# Altium PCB Charger.PcbDoc
Units mm, origin at the board's own origin, x right, y up, seen from the top; angles counter-clockwise.
Board outline 28.74 x 23.59 mm, 4 copper layers (Top Layer, Layer 1, Layer 2, Bottom Layer), stack 1.012 mm thick; 75 components, 57 nets, 264 pads, 94 vias.
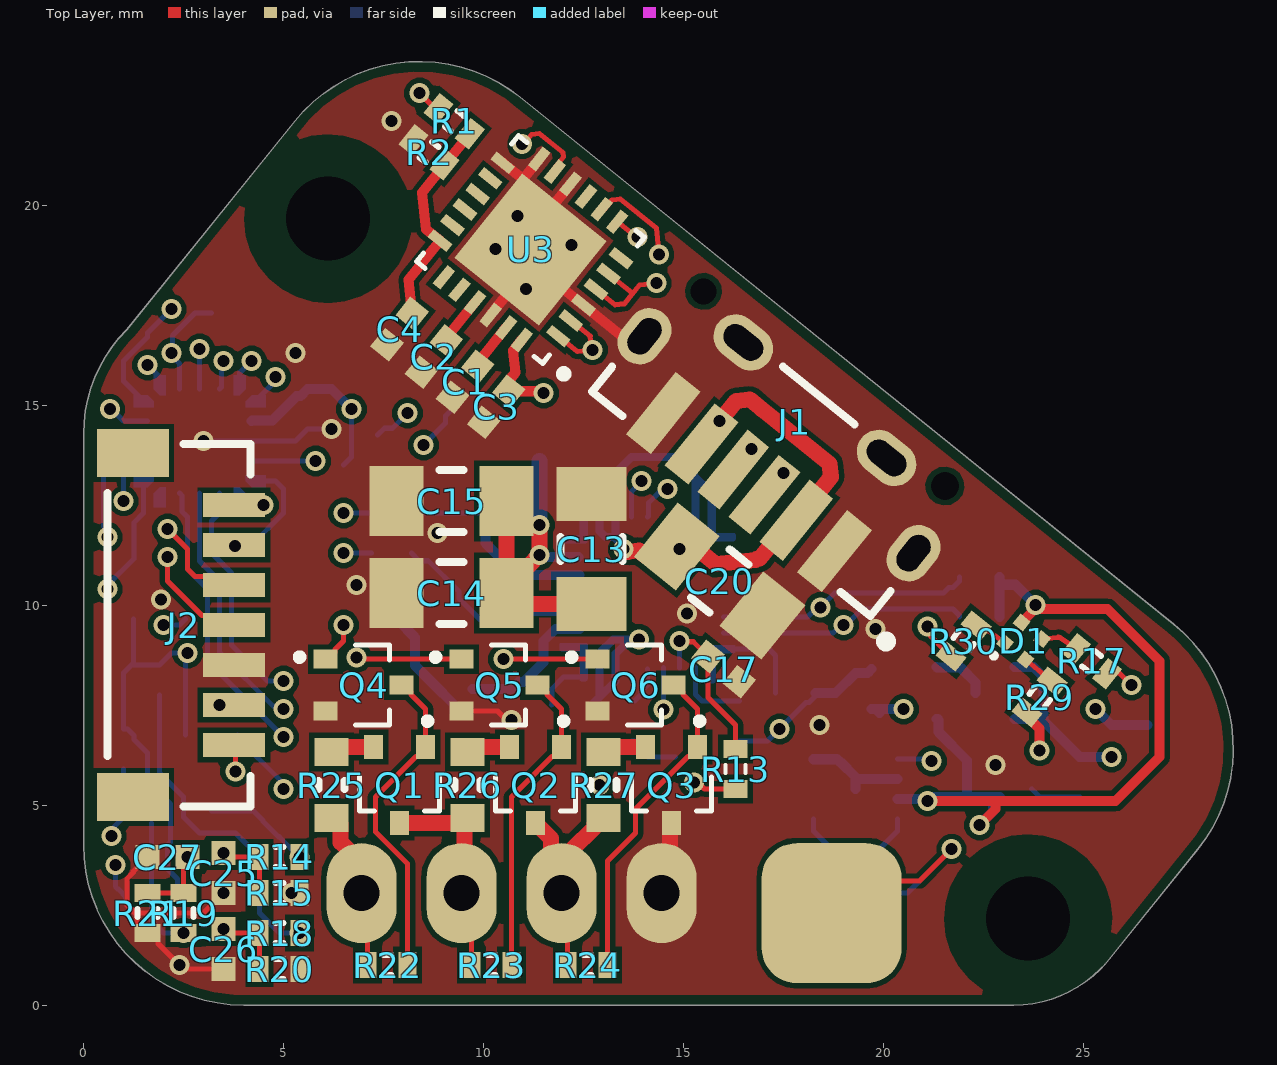
[diagram p0: Top Layer view]
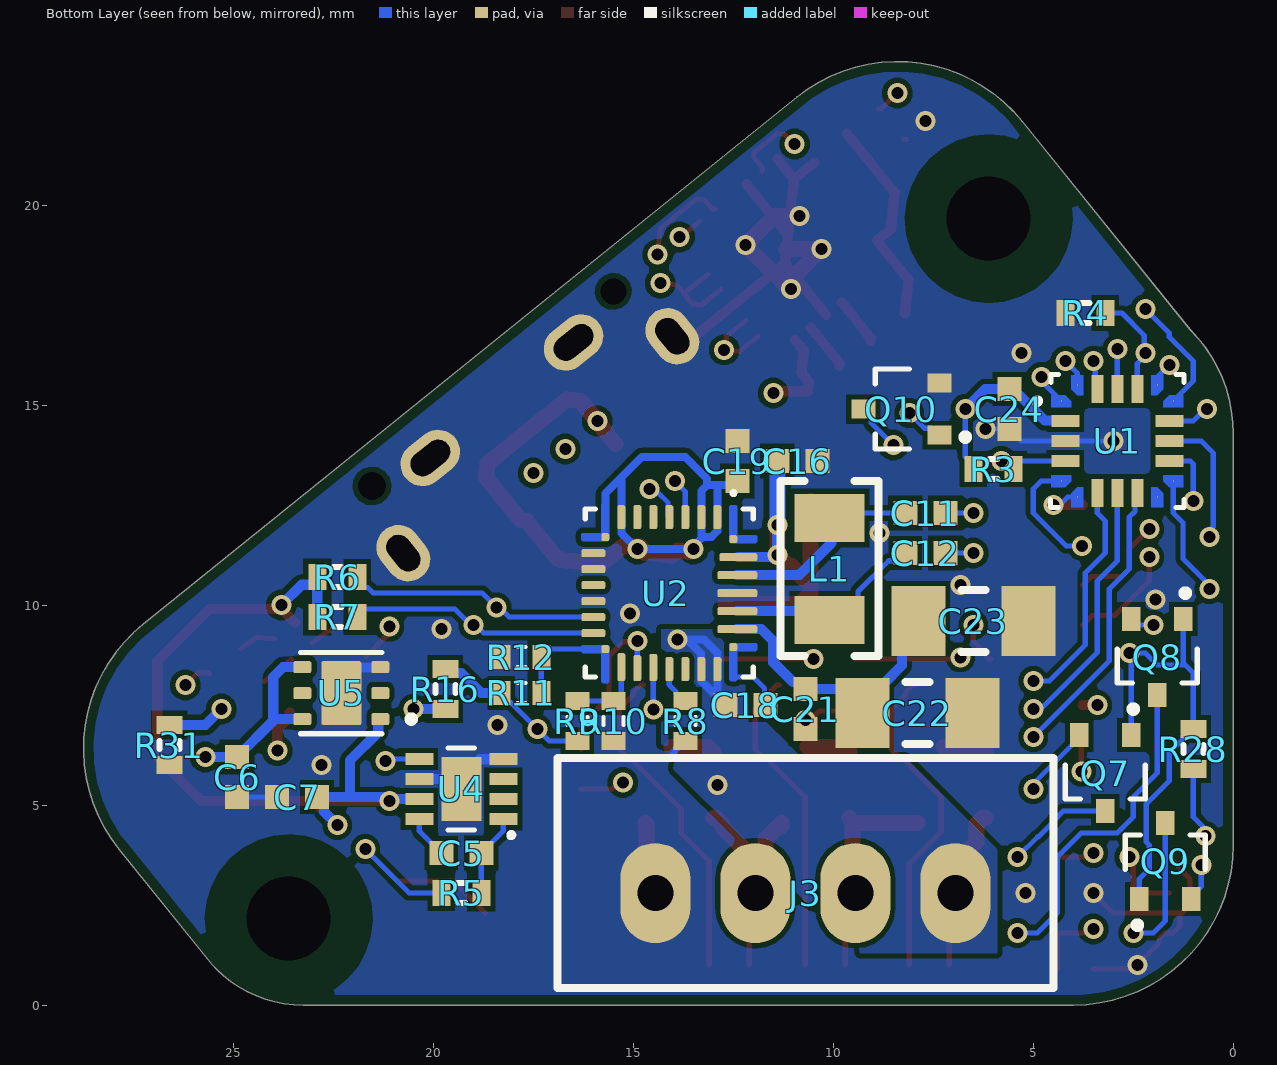
[diagram p1: Bottom Layer view, seen from below]
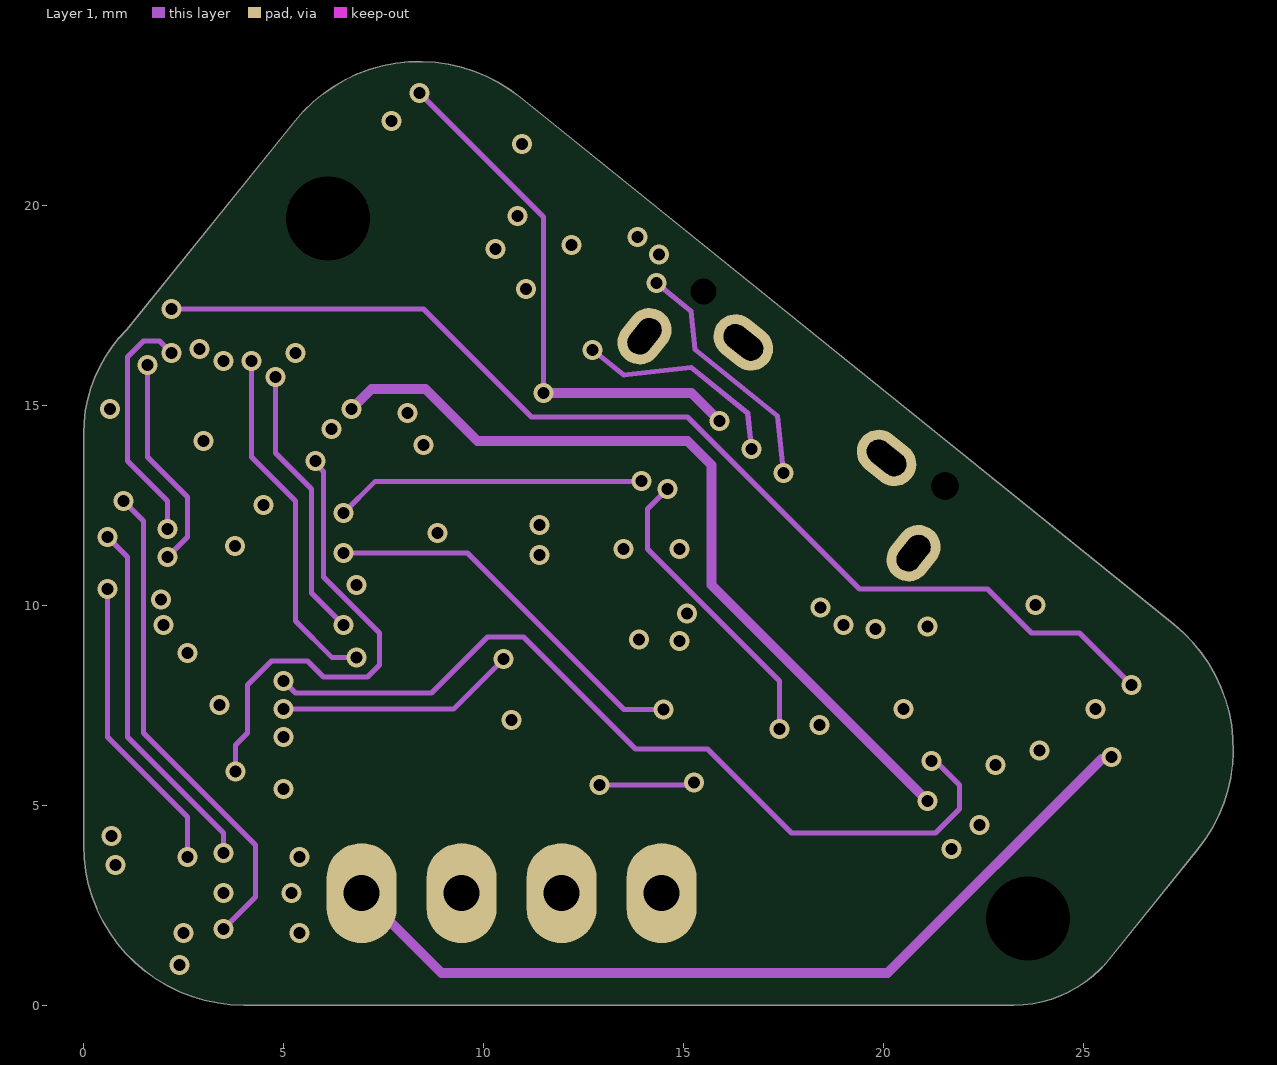
[diagram p2: Layer 1]
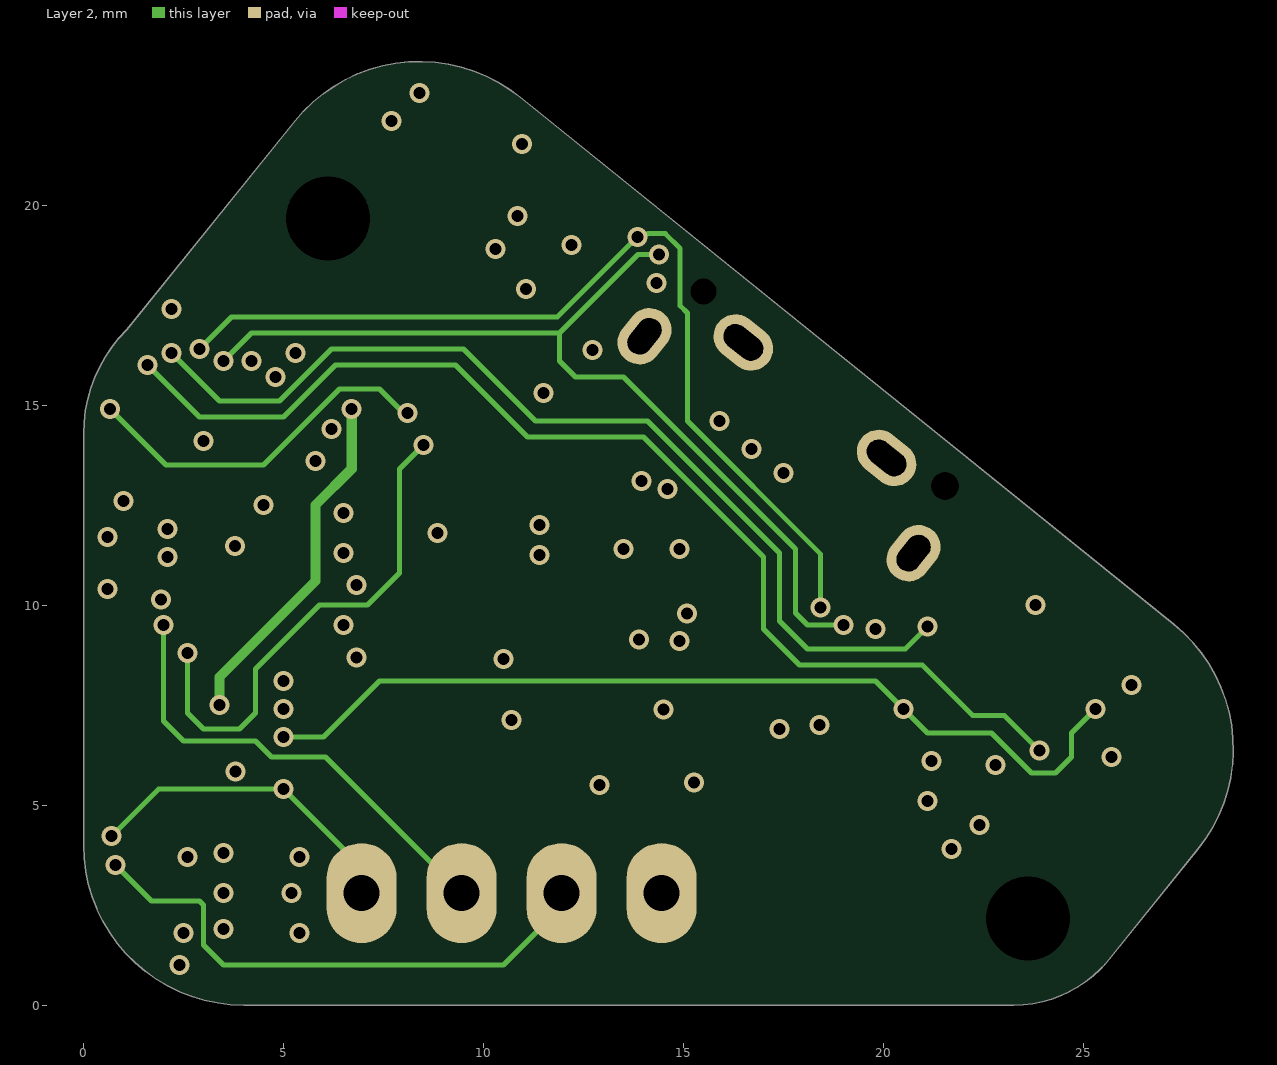
[diagram p3: Layer 2]

## Layer stack, top to bottom
Top Solder: solder mask 0.01, Solder Resist, Dk 3.5
Top Layer: signal copper 0.035
Dielectric 2: prepreg 0.0711, PP-006, Dk 4.1
Layer 1: signal copper 0.035
Dielectric 1: dielectric 0.73, FR-4, Dk 4.8
Layer 2: signal copper 0.035
Dielectric 3: prepreg 0.0711, PP-006, Dk 4.1
Bottom Layer: signal copper 0.035
Bottom Solder: solder mask 0.01, Solder Resist, Dk 3.5

## Board outline
0,4 0,14.284 cw(c3.678,14.284) 1.077,16.884 5.283,22.1 cw(c8.397,19.588) 10.908,22.702 27.254,9.519 cw(c24.743,6.406) 27.857,3.894 25.534,1.014 25.418,0.898 cw(c23.25,3.066) 23.25,0 22.3,0 4,0 cw(c4,4)

## Design rules (kind name [scope] priority, off if disabled: settings)
BoardOutlineClearance [All] p1: gap=0.254 ignorepadtopadclearanceinfootprint=FALSE except(0: Arc-SplitContinuation Track-SplitContinuation SMDPad-SplitContinuation THPad-SplitContinuation Via-SplitContinuation Fill-SplitContinuation Poly-SplitContinuation Region-SplitContinuation Text-SplitContinuation)
Clearance [All] p1: gap=0.128 ignorepadtopadclearanceinfootprint=FALSE
PolygonConnect [All] p1: connectstyle=Direct reliefconductorwidth=0.254 reliefentries=4 polygonreliefangle="90 Angle" airgapwidth=0.254
RoutingVias [All] p1: holewidth=0.3 width=0.5 viastyle="Through Hole" minholewidth=0.3 minwidth=0.5 maxholewidth=0.5 maxwidth=0.7
SolderMaskExpansion SolderMaskExpansion_Via [isvia] p1: expansion=0 istentingtop=TRUE
SolderMaskExpansion [All] p2: expansion=0.05 istentingtop=FALSE
SupplyNets "Schematic Supply Nets_3" [InNet('VCELL3')] p1: voltage=0.000
SupplyNets "Schematic Supply Nets_2" [InNet('3V3')] p2: voltage=0.000
SupplyNets "Schematic Supply Nets_1" [InNet('VBUS')] p3: voltage=0.000
SupplyNets "Schematic Supply Nets" [InNet('GND')] p4: voltage=0.000
Width [All] p1: maxlimit=0.4 minlimit=0.127 preferedwidth=0.254
30 further rules are at their usual default settings.

## Classes and differential pairs
component class Power: C1 C2 C3 C4 C11 C12 C13 C14 C15 C16 C17 C18 C19 C20 C21 C22 C23 J1 J3 L1 Q1 Q2 Q3 Q4 Q5 Q6 R1 R2 R6 R7 R8 R9 R10 R11 R12 R13 R16 R22 R23 R24 R25 R26 R27 R31 U2 U3

## Components (designator, comment, footprint, x,y, rotation, side; value= is the part's Value field where it differs from the comment)
C1 "MAASL105CD7105MFCA01" "Generic 0402 capacitor" 9.537,15.586 r51.12 top value=1µF
C2 "MAASL105CD7105MFCA01" "Generic 0402 capacitor" 8.758,16.214 r51.12 top value=1µF
C3 "MAASL105CD7105MFCA01" "Generic 0402 capacitor" 10.315,14.958 r51.12 top value=1µF
C4 "MAASL105CD7105MFCA01" "Generic 0402 capacitor" 7.9,16.9 r51.12 top value=1µF
C5 "GRT155R71H104KE01D" "Generic 0402 capacitor" 19.3,3.8 r0 bottom value=100nF
C6 "MAASL105CD7105MFCA01" "Generic 0402 capacitor" 24.905,5.7 r90 bottom value=1µF
C7 "MAASL105CD7105MFCA01" "Generic 0402 capacitor" 23.405,5.2 r180 bottom value=1µF
C11 "GRT155R71H104KE01D" "Generic 0402 capacitor" 7.7,12.3 r0 bottom value=100nF
C12 "GRT155R71H104KE01D" "Generic 0402 capacitor" 7.7,11.3 r0 bottom value=100nF
C13 "CL31A106MBHNNNE" "Generic 1206 Capacitor" 12.7,11.4 r270 top value=10µF
C14 "CL31A106MBHNNNE" "Generic 1206 Capacitor" 9.2,10.3 r0 top value=10µF
C15 "CL31A106MBHNNNE" "Generic 1206 Capacitor" 9.2,12.6 r0 top value=10µF
C16 "GRT155R71H104KE01D" "Generic 0402 capacitor" 10.9,13.6 r180 bottom value=100nF
C17 "GRT155R71H104KE01D" "Generic 0402 capacitor" 16,8.4 r321.12 top value=100nF
C18 "GRT155R71H104KE01D" "Generic 0402 capacitor" 12.2,7.5 r0 bottom value=100nF
C19 "GRT155R71H104KE01D" "Generic 0402 capacitor" 12.4,13.6 r90 bottom value=100nF
C20 "CL31A106MBHNNNE" "Generic 1206 Capacitor" 15.9,10.6 r141.12 top value=10µF
C21 "GRT155R71H104KE01D" "Generic 0402 capacitor" 10.7,7.4 r270 bottom value=100nF
C22 "CL31A106MBHNNNE" "Generic 1206 Capacitor" 7.9,7.3 r0 bottom value=10µF
C23 "CL31A106MBHNNNE" "Generic 1206 Capacitor" 6.5,9.6 r0 bottom value=10µF
C24 "GRT155R71H104KE01D" "Generic 0402 capacitor" 5.6,14.9 r90 bottom value=100nF
C25 "GRT155R71H104KE01D" "Generic 0402 capacitor" 3.5,3.3 r90 top value=100nF
C26 "GRT155R71H104KE01D" "Generic 0402 capacitor" 3.5,1.4 r90 top value=100nF
C27 "GRT155R71H104KE01D" "Generic 0402 capacitor" 2.1,3.7 r0 top value=100nF
D1 "UHD111A-FKA-C3K23E1L3VG5ZB3Z3" UHD111A-FKA-C3K23E1L3VG5ZB3Z3 23.5,9.1 r51.12 top
J1 "USB4140-GF-0230-C" USB4140-GF-0230-C 17.386,14.009 r141.12 top
J2 "BM07B-SRSS-TB(LF)(SN)" "JST BM07B-SRSS-TB" 2.5,9.5 r90 top
J3 "B4B-XH-A(LF)(SN)" "JST XH B4B-XH-A" 10.7,2.8 r0 bottom
L1 "4.7µH" "IND 1008_2520" 10.1,10.9 r90 bottom
Q1 "DMN61D9UWQ-7" DMN61D9UWQ-7 7.9,5.5 r270 top
Q2 "DMN61D9UWQ-7" DMN61D9UWQ-7 11.3,5.5 r270 top
Q3 "DMN61D9UWQ-7" DMN61D9UWQ-7 14.7,5.5 r270 top
Q4 "DMN61D9UWQ-7" DMN61D9UWQ-7 7,8 r0 top
Q5 "DMN61D9UWQ-7" DMN61D9UWQ-7 10.4,8 r0 top
Q6 "DMN61D9UWQ-7" DMN61D9UWQ-7 13.8,8 r0 top
Q7 "DMN61D9UWQ-7" DMN61D9UWQ-7 3.2,5.8 r270 bottom
Q8 "DMN61D9UWQ-7" DMN61D9UWQ-7 1.9,8.7 r270 bottom
Q9 "DMN61D9UWQ-7" DMN61D9UWQ-7 1.7,3.6 r90 bottom
Q10 "DMN61D9UWQ-7" DMN61D9UWQ-7 8.3,14.9 r0 bottom
R1 "RC0402JR-07620RL" "Generic 0402 Resistor" 9.266,22.099 r141.12 top value=620
R2 "WR04X1001FTL" "Generic 0402 Resistor" 8.638,21.321 r321.12 top value=1k
R3 "WR04X1001FTL" "Generic 0402 Resistor" 6,13.4 r0 bottom value=1k
R4 "WR04X1001FTL" "Generic 0402 Resistor" 3.7,17.3 r180 bottom value=1k
R5 "WR04X000PTL" "Generic 0402 Resistor" 19.3,2.8 r180 bottom value=0
R6 "WR04X472JTL" "Generic 0402 Resistor" 22.4,10.7 r180 bottom value=4.7k
R7 "WR04X472JTL" "Generic 0402 Resistor" 22.4,9.7 r180 bottom value=4.7k
R8 "13.7k" RES_0402 13.7,7.1 r90 bottom
R9 "1k" RES_0402 16.4,7.1 r90 bottom
R10 "10k" RES_0402 15.5,7.1 r270 bottom
R11 "5.24k" RES_0402 17.8,7.8 r180 bottom
R12 "7.52k" RES_0402 17.8,8.7 r0 bottom
R13 "100" RES_0402 16.3,5.9 r90 top
R14 "RMCF0402FT11K0" "Generic 0402 Resistor" 4.9,3.7 r0 top value=11k
R15 "WR04X7502FTL" "Generic 0402 Resistor" 4.9,2.8 r180 top value=75k
R16 "AC0402FR-0736KL" "Generic 0402 Resistor" 19.7,7.9 r90 bottom value=36k
R17 "RMCF0402FT330R" "Generic 0402 Resistor" 25.2,8.6 r141.12 top value=330
R18 "RMCF0402FT11K0" "Generic 0402 Resistor" 4.9,1.8 r0 top value=11k
R19 "RMCF0402FT11K0" "Generic 0402 Resistor" 2.5,2.3 r270 top value=11k
R20 "WR04X7502FTL" "Generic 0402 Resistor" 4.9,0.9 r180 top value=75k
R21 "WR04X7502FTL" "Generic 0402 Resistor" 1.6,2.3 r90 top value=75k
R22 "WR04X103JTL" "Generic 0402 Resistor" 7.6,1 r0 top value=10k
R23 "WR04X103JTL" "Generic 0402 Resistor" 10.2,1 r0 top value=10k
R24 "WR04X103JTL" "Generic 0402 Resistor" 12.6,1 r0 top value=10k
R25 "WR06X000PTL" "Generic 0603 Resistor" 6.2,5.5 r90 top value=0
R26 "WR06X000PTL" "Generic 0603 Resistor" 9.6,5.5 r90 top value=0
R27 "WR06X000PTL" "Generic 0603 Resistor" 13,5.5 r90 top value=0
R28 "WR04X1001FTL" "Generic 0402 Resistor" 1,6.4 r270 bottom value=1k
R29 "RMCF0402FT330R" "Generic 0402 Resistor" 23.9,7.7 r51.12 top value=330
R30 "RMCF0402FT330R" "Generic 0402 Resistor" 22,9.1 r51.12 top value=330
R31 "AC0402FR-0736KL" "Generic 0402 Resistor" 26.6,6.5 r90 bottom value=36k
U1 "STM32C011F6U6TR" "20-UFQFPN (3x3)" 2.9,14.1 r180 bottom
U2 "BQ25798RQMR" "29-VQFN-HR (4x4)" 14.1,10.3 r270 bottom
U3 "STUSB4500QTR" FP-QFN-24-EP_4x4-MFG 11.174,18.89 r141.12 top
U4 "AT42QT1010-MAHR" AT42QT1010-MAHR 19.3,5.4 r0 bottom
U5 "TPS70933DRVT" WSON_6_2.0x2.0x0.8mm_0.65P 22.3,7.8 r0 bottom

## Footprints (in the part's own frame and the unit in brackets; to place one, negate y for a bottom-side part, rotate by r counter-clockwise, add the part's x,y. Pads: shape width x height; smd on the part's side, far side on the other; paste and mask are expansions set on the pad)
"20-UFQFPN (3x3)" [mm]
  round 0.025 smd: 1(-1.4,1) 5(-1.4,-1) 6(-1,-1.4) 10(1,-1.4) 11(1.4,-1) 15(1.4,1) 16(1,1.4) 20(-1,1.4)
  rect 0.7x0.3 smd: 2(-1.3,0.5) 3(-1.3,0) 4(-1.3,-0.5) 12(1.3,-0.5) 13(1.3,0) 14(1.3,0.5)
  rect 0.3x0.7 smd: 7(-0.5,-1.3) 8(0,-1.3) 9(0.5,-1.3) 17(0.5,1.3) 18(0,1.3) 19(-0.5,1.3)
  silkscreen extent -2.07,-1.67 1.67,1.67, body extent -1.5,-1.5 1.5,1.5, height 0.6
"29-VQFN-HR (4x4)" [mm]
  rrect50% 0.2x0.2 smd: 1(-1.35,1.6) 9(-1.4,-1.6) 16(1.4,-1.6) 24(1.35,1.6)
  rrect50% 0.6x0.2 smd: 2(-1.9,1.2) 3(-1.9,0.8) 4(-1.9,0.4) 5(-1.9,0) 6(-1.9,-0.4) 7(-1.9,-0.8) 8(-1.9,-1.2) 20(1.9,0) 21(1.9,0.4) 22(1.9,0.8) 23(1.9,1.2)
  rrect50% 0.2x0.6 smd: 10(-1,-1.9) 11(-0.6,-1.9) 12(-0.2,-1.9) 13(0.2,-1.9) 14(0.6,-1.9) 15(1,-1.9)
  rrect50% 0.7x0.2 smd: 17(1.85,-1.2)
  rrect50% 0.65x0.2 smd: 18(1.875,-0.8)
  rrect50% 0.68x0.2 smd: 19(1.86,-0.4)
  rrect50% 0.2x1 smd: 25(0.9,1.7) 26(0.45,1.7) 27(0,1.7) 28(-0.45,1.7)
  rrect50% 0.2x0.95 smd: 29(-0.9,1.725)
  Top Layer region: 2.2,-1.5 1.35,-1.5 1.331,-1.504 1.315,-1.515 1.304,-1.531 1.3,-1.55 1.3,-1.55 1.3,-2.15 1.304,-2.169 1.315,-2.185 1.331,-2.196 1.35,-2.2 1.35,-2.2 1.45,-2.2 1.469,-2.196 1.485,-2.185 1.496,-2.169 1.5,-2.15 1.5,-2.15 1.5,-1.7 2.2,-1.7 2.219,-1.696 2.235,-1.685 2.246,-1.669 2.25,-1.65 2.25,-1.65 2.25,-1.55 2.246,-1.531 2.235,-1.515 2.219,-1.504 2.2,-1.5
  Top Layer region: -2.2,-1.5 -1.35,-1.5 -1.331,-1.504 -1.315,-1.515 -1.304,-1.531 -1.3,-1.55 -1.3,-1.55 -1.3,-2.15 -1.304,-2.169 -1.315,-2.185 -1.331,-2.196 -1.35,-2.2 -1.35,-2.2 -1.45,-2.2 -1.469,-2.196 -1.485,-2.185 -1.496,-2.169 -1.5,-2.15 -1.5,-2.15 -1.5,-1.7 -2.2,-1.7 -2.219,-1.696 -2.235,-1.685 -2.246,-1.669 -2.25,-1.65 -2.25,-1.65 -2.25,-1.55 -2.246,-1.531 -2.235,-1.515 -2.219,-1.504 -2.2,-1.5
  Top Layer region: 2.15,1.5 1.3,1.5 1.281,1.504 1.265,1.515 1.254,1.531 1.25,1.55 1.25,1.55 1.25,2.15 1.254,2.169 1.265,2.185 1.281,2.196 1.3,2.2 1.3,2.2 1.4,2.2 1.419,2.196 1.435,2.185 1.446,2.169 1.45,2.15 1.45,2.15 1.45,1.7 2.15,1.7 2.169,1.696 2.185,1.685 2.196,1.669 2.2,1.65 2.2,1.65 2.2,1.55 2.196,1.531 2.185,1.515 2.169,1.504 2.15,1.5
  Top Layer region: -2.15,1.5 -1.3,1.5 -1.281,1.504 -1.265,1.515 -1.254,1.531 -1.25,1.55 -1.25,1.55 -1.25,2.15 -1.254,2.169 -1.265,2.185 -1.281,2.196 -1.3,2.2 -1.3,2.2 -1.4,2.2 -1.419,2.196 -1.435,2.185 -1.446,2.169 -1.45,2.15 -1.45,2.15 -1.45,1.7 -2.15,1.7 -2.169,1.696 -2.185,1.685 -2.196,1.669 -2.2,1.65 -2.2,1.65 -2.2,1.55 -2.196,1.531 -2.185,1.515 -2.169,1.504 -2.15,1.5
  silkscreen extent -2.55,-2.1 2.1,2.1, body extent -2,-2 2,2, height 1
AT42QT1010-MAHR [mm] "8-UDFN, USON"
  rect 0.7x0.3 smd: 1(-1.05,0.75) 2(-1.05,0.25) 3(-1.05,-0.25) 4(-1.05,-0.75) 5(1.05,-0.75) 6(1.05,-0.25) 7(1.05,0.25) 8(1.05,0.75)
  rect 1x1.6 smd: 9(0,0)
  silkscreen extent -1.3,-1.02 0.33,1.2, body extent -0.97,-1 0.98,1, height 0.65
DMN61D9UWQ-7 [mm] "SC-70, SOT-323"
  rect 0.6x0.47 smd: 1(-0.95,0.65) 2(-0.95,-0.65) 3(0.95,0)
  silkscreen extent -1.67,-1 0.65,1, body extent -1.05,-1 1.05,1, height 1.1
FP-QFN-24-EP_4x4-MFG [mm]
  rect 0.6x0.25 smd: 1(-1.9,1.25) 2(-1.9,0.75) 3(-1.9,0.25) 4(-1.9,-0.25) 5(-1.9,-0.75) 6(-1.9,-1.25) 13(1.9,-1.25) 14(1.9,-0.75) 15(1.9,-0.25) 16(1.9,0.25) 17(1.9,0.75) 18(1.9,1.25)
  rect 0.25x0.6 smd: 7(-1.25,-1.9) 8(-0.75,-1.9) 9(-0.25,-1.9) 10(0.25,-1.9) 11(0.75,-1.9) 12(1.25,-1.9) 19(1.25,1.9) 20(0.75,1.9) 21(0.25,1.9) 22(-0.25,1.9) 23(-0.75,1.9) 24(-1.25,1.9)
  rect 2.7x2.7 smd: 25(0,0)
  silkscreen extent -2.67,-2.03 2.03,2.03, body extent -2,-2 2,2, height 1
"Generic 0402 capacitor" [mm] "Generic 0402 capacitor"
  rect 0.6x0.6 smd: 1(-0.5,0) 2(0.5,0)
  body extent -0.5,-0.25 0.5,0.25, height 0.5
"Generic 0402 Resistor" [mm]
  rect 0.45x0.65 smd: 1(-0.5,0) 2(0.5,0)
  silkscreen extent -0.1,-0.25 0.1,0.25, body extent -0.5,-0.25 0.5,0.25, height 0.35
"Generic 0603 Resistor" [mm] "Chip Resistor, 2-Leads, Body 1.60x0.80mm, IPC Medium Density"
  rect 0.7x0.85 smd: 1(-0.825,0) 2(0.825,0)
  silkscreen extent -0.1,-0.33 0.1,0.33, body extent -0.8,-0.4 0.8,0.4, height 0.45
"Generic 1206 Capacitor" [mm] "Chip Capacitor, 2-Leads, Body 3.20x1.60mm, IPC Medium Density"
  rect 1.35x1.75 smd: 1(-1.375,0) 2(1.375,0)
  silkscreen extent -0.3,-0.77 0.3,0.78, body extent -1.6,-0.8 1.6,0.8, height 1.6
"IND 1008_2520" [mm] "Chip Inductance, 2-leads, Body 2.5x2.1mm, IPC Medium Density"
  rect 1.2x1.75 smd: 1(-1.275,0) 2(1.275,0)
  silkscreen extent -2.18,-1.22 2.2,1.23, body extent -1.3,-1.05 1.3,1.05, height 1
"JST BM07B-SRSS-TB" [mm] "1.0mm pitch/Disconnectable Crimp style connector"
  rect 0.6x1.55 smd: 1(-3,-1.262) 2(-2,-1.262) 3(-1,-1.262) 4(0,-1.262) 5(1,-1.262) 6(2,-1.262) 7(3,-1.262)
  rect 1.2x1.8 smd: M(-4.3,1.263) M(4.3,1.263)
  silkscreen extent -4.53,-1.68 4.53,1.91, body extent -4.5,-1.69 4.5,1.91, height 4.32
"JST XH B4B-XH-A" [mm]
  oval 1.75x2.5 hole 0.9: 1(-3.75,0) 2(-1.25,0) 3(1.25,0) 4(3.75,0)
  silkscreen extent -6.2,-3.38 6.2,2.38, body extent -6.2,-3.37 6.2,2.38, height 7
RES_0402 [mm]
  rect 0.45x0.6 smd: 1(-0.5,0) 2(0.5,0)
  silkscreen extent -0.1,-0.25 0.1,0.25, body extent -0.5,-0.25 0.5,0.25, height 0.35
UHD111A-FKA-C3K23E1L3VG5ZB3Z3 [mm] "0404"
  rect 0.32x0.32 smd: 1(-0.33,0.33) 2(-0.33,-0.33) 3(0.33,-0.33) 4(0.33,0.33)
  silkscreen extent -0.81,0.29 -0.69,0.41, body extent -0.5,-0.5 0.5,0.5, height 0.61
USB4140-GF-0230-C [mm]
  rect 0.7x2 smd: A5(-0.5,1.2) B5(0.5,1.2)
  rect 0.76x2 smd: A9(1.52,1.2) B9(-1.52,1.2)
  rect 0.8x2 smd: A12(2.75,1.2) B12(-2.75,1.2)
  round 0 hole 0.7 unplated: H1(-3.875,-1.8)
  round 0 hole 0.65 unplated: H2(3.875,-1.8)
  oval 1.1x1.5 hole 0.6 slot 1 at 90 deg: SH1(-4.32,0) SH2(4.32,0)
  oval 1.6x1.1 hole 0.6 slot 1.1 at 0 deg: SH3(-2.3,-1.43) SH4(2.3,-1.43)
  silkscreen extent -5.29,-1.58 4.47,2.27, body extent -4.47,-2.4 4.47,1.9, height 6.5
WSON_6_2.0x2.0x0.8mm_0.65P [mm]
  rrect33% 0.45x0.3 smd: 1(-0.975,0.65) 2(-0.975,0) 3(-0.975,-0.65) 4(0.975,-0.65) 5(0.975,0) 6(0.975,0.65)
  rrect10% 1x1.6 smd: 7(0,0)
  silkscreen extent -1.83,-1.02 1.02,1.02, body extent -1,-1 1,1, height 0.8

## Part data
C1 C2 C3 C4 C6 C7: library part CMP-001-00104-2, "Cap Cer 1UF 20V X7T 0402", Capacitor Type=Ceramic, Case/Package=0402, Max Operating Temperature=125°C, Min Operating Temperature=-55°C, Temperature Coefficient=X7R, Tolerance=20%, Voltage Rating=10V, AECQ=Yes, Mounting Technology="Surface Mount", Pins=2, RoHS Compliant=Yes
C5 C11 C12 C16 C17 C18 C19 C21 C24 C25 C26 C27: library part CMP-001-00084-12, "Ceramic Capacitor, Multilayer, Ceramic, 50V, 10% +Tol, 10% -Tol, X7R, 15% TC, 0.1uF, Surface Mount, 0402", Capacitor Type=Ceramic, Case/Package=0402, Max Operating Temperature=125°C, Min Operating Temperature=-55°C, Package Shape=Rectangular, Temperature Coefficient=X7R, Tolerance=10%, Voltage Rating=50V, AECQ=Yes, Dielectric Material=Ceramic, Mounting Technology="Surface Mount", Multilayer=Yes, Packaging="Tape and Reel", Pins=2, Reach SVHC Compliant=Yes, RoHS Compliant=Yes, Terminal Finish=Nickel, Termination=Wraparound
C13 C14 C15 C20 C22 C23: library part CMP-001-00092-6, "Ceramic Capacitor, Multilayer, Ceramic, 50V, 20% +Tol, 20% -Tol, X5R, 15% TC, 10uF, Surface Mount, 1206", Capacitor Type=Ceramic, Case/Package=1206, Max Operating Temperature=85°C, Min Operating Temperature=-55°C, Package Shape=Rectangular, Temperature Characteristics Code=X5R, Tolerance=20%, Voltage Rating=50V, AECQ=No, Dielectric Material=Ceramic, JESD-609 Code=e3, Mounting Technology="Surface Mount", Multilayer=Yes, Packaging="Tape and Reel", Pins=2, Reach SVHC Compliant=Yes, RoHS Compliant=Yes, Temperature Coefficient=X5R, Terminal Finish=Nickel, Termination=Wraparound
D1: library part CMP-007-00049-1, "LED Chip Blue/Green/Red 469nm/528nm/622nm 10A/10A/10A 4-Pin SMD T/R"
J1: library part CMP-002-00127-3, "USB Connector, 6 Contact(s), Female, Straight, Surface Mount Terminal, Locking, Receptacle", Manufacturer=Molex, Max Current Rating=5A, Max Operating Temperature=85°C, Min Operating Temperature=-25°C, Connector Type=USB-C, Gender=RCPT, Pins=6
J2: "CONN HEADER SMD 7POS 1MM", Current Rating (Amps)=0.7A, Insulation Color=Natural, Manufacturer="JST Sales America Inc.", Material Flammability Rating="UL94 V-0", Operating Temperature="-25°C ~ 85°C", Supplier Part Number 1=455-1793-1-ND, Voltage Rating=50V, ComponentLink1Description=Datasheet, ComponentLink1URL=http://www.jst-mfg.com/product/pdf/eng/eSH.pdf, ComponentLink2Description="DigiKey Link", ComponentLink2URL=http://digikey.com/product-detail/en/jst-sales-america-inc/BM07B-SRSS-TB-LF-SN/455-1793-1-ND/926864, Connector Type=Header, Contact Finish - Mating=Tin, Contact Finish - Post=Tin, Contact Material="Copper Alloy", Contact Shape=Square, Contact Type="Male Pin", Fastening Type=Push-Pull, Features="Solder Retention", Insulation Height="0.167\" (4.25mm)", Insulation Material="Polyamide (PA), Nylon", LastUpdated="1/12/2020 10:15:04 PM", Lifecycle Status=Active, Minimum Order=1, Mounting Type="Surface Mount", Number of Positions=7, Number of Positions Loaded=All, Number of Rows=1, Packaging=TapeAndReel, Part Number=BM07B-SRSS-TB(LF)(SN), Part Status=Active, PartId=22, Pitch - Mating="0.039\" (1.00mm)", Price=0.42, Series=SR, Shrouding="Shrouded - 4 Wall", Style="Board to Cable/Wire", Supplier 1=DigiKey, Termination=Solder
J3: "CONN HEADER VERT 4POS 2.5MM", Current Rating (Amps)=3A, Insulation Color=Natural, Manufacturer="JST Sales America Inc.", Material Flammability Rating="UL94 V-0", Operating Temperature="-25°C ~ 85°C", Supplier Part Number 1=455-2249-ND, Voltage Rating=250V, ComponentLink1Description=Datasheet, ComponentLink1URL=http://www.jst-mfg.com/product/pdf/eng/eXH.pdf, ComponentLink2Description="DigiKey Link", ComponentLink2URL=http://digikey.com/product-detail/en/jst-sales-america-inc/B4B-XH-A-LF-SN/455-2249-ND/1651047, Connector Type=Header, Contact Finish - Mating=Tin, Contact Finish - Post=Tin, Contact Length - Post="0.134\" (3.40mm)", Contact Material=Brass, Contact Shape=Square, Contact Type="Male Pin", Fastening Type="Detent Lock", Insulation Height="0.276\" (7.00mm)", Insulation Material="Polyamide (PA66), Nylon 6/6", LastUpdated="1/12/2020 11:46:34 PM", Lifecycle Status=Active, Minimum Order=1, Mounting Type="Through Hole", Number of Positions=4, Number of Positions Loaded=All, Number of Rows=1, Packaging=Bulk, Part Number=B4B-XH-A(LF)(SN), Part Status=Active, PartId=69, Pitch - Mating="0.098\" (2.50mm)", Price=0.21, Series=XH, Shrouding="Shrouded - 4 Wall", Style="Board to Cable/Wire", Supplier 1=DigiKey, Termination="Press-Fit, Solder"
L1: library part MLP2520S4R7ST0S1, "FIXED IND 4.7UH 1A 110 MOHM SMD", Current Rating (Amps)=1A, DC Resistance (DCR)="143mOhm Max", Device Package="1008 (2520 Metric)", Inductance Frequency - Test=2MHz, Manufacturer="TDK Corporation", Operating Temperature="-40°C ~ 125°C", Supplier Part Number 1=445-6378-1-ND, Tolerance=±20%, ComponentLink1Description=Datasheet, ComponentLink1URL=https://product.tdk.com/info/en/catalog/datasheets/inductor_commercial_power_mlp2520_en.pdf?ref_disty=digikey, ComponentLink2Description="DigiKey Link", ComponentLink2URL=http://digikey.com/product-detail/en/tdk-corporation/MLP2520S4R7ST0S1/445-6378-1-ND/2465705, Height - Seated (Max)="0.039\" (1.00mm)", Inductance=4.7µH, LastUpdated="9/2/2020 1:29:23 AM", Lifecycle Status=Active, Material - Core=Ferrite, Minimum Order=1, Mounting Type="Surface Mount", Package / Case="1008 (2520 Metric)", Packaging=TapeAndReel, Part Number=MLP2520S4R7ST0S1, Part Status=Active, PartId=3467, Price=0.14, Series=MLP, Shielding=Shielded, Size / Dimension="0.098\" L x 0.079\" W (2.50mm x 2.00mm)", Supplier 1=DigiKey, Supplier Device Package="1008 (2520 Metric)", Type=Multilayer
Q1 Q2 Q3 Q4 Q5 Q6 Q7 Q8 Q9 Q10: library part CMP-013-00037-3, "Small Signal Field-Effect Transistor", Max Operating Temperature=175°C, Min Operating Temperature=-55°C, RoHS Compliant=Yes, Transistor Type=n-FET
R1: library part CMP-009-00209-4, "Fixed Resistor, Metal Glaze/thick Film, 0.0625W, 620ohm, 50V, 5% +/-Tol, 100ppm/Cel, Surface Mount, 0402", Case/Package=0402, Max Operating Temperature=155°C, Min Operating Temperature=-55°C, Power=62.5mW, Tolerance=5%, AECQ=No, Mounting Technology="Surface Mount", Pins=2, RoHS Compliant=Yes
R2 R3 R4 R28: library part CMP-009-00182-8, "Fixed Resistor, Metal Glaze/thick Film, 0.0625W, 1000ohm, 50V, 1% +/-Tol, 100ppm/Cel, Surface Mount, 0402", Case/Package=0402, Manufacturer Part Number=Blank, Max Operating Temperature=155°C, Min Operating Temperature=-55°C, Package Height=0.35mm, Package Length=1mm, Package Shape=Rectangular, Package Width=0.5mm, Power=62.5mW, Rated Temperature=70°C, Resistor Type="FIXED RESISTOR", Temperature Coefficient (ppm/Cel)=100, Tolerance=1%, Working Voltage=50V, Additional Feature="LASER TRIMMABLE", AECQ=No, Construction=Chip, JESD-609 Code=e3, Mounting Technology="Surface Mount", Packaging="Tape and Reel", Pins=2, Reach SVHC Compliant=Yes, RoHS Compliant=Yes, Technology="METAL GLAZE/THICK FILM", Terminal Finish=Nickel, Termination=Wraparound
R5: library part CMP-009-00186-8, "Fixed Resistor, Metal Glaze/thick Film, 0.0625W, 0ohm, Surface Mount, 0402", Case/Package=0402, Manufacturer Part Number=Blank, Max Operating Temperature=155°C, Min Operating Temperature=-55°C, Package Height=0.35mm, Package Length=1mm, Package Shape=Rectangular, Package Width=0.5mm, Power=62.5mW, Rated Temperature=70°C, Resistor Type="FIXED RESISTOR", Tolerance=0%, AECQ=No, Construction=Chip, JESD-609 Code=e3, Mounting Technology="Surface Mount", Packaging="Tape and Reel", Pins=2, Reach SVHC Compliant=Yes, RoHS Compliant=Yes, Technology="METAL GLAZE/THICK FILM", Terminal Finish=Nickel, Termination=Wraparound
R6 R7: library part CMP-009-00184-8, "Fixed Resistor, Metal Glaze/thick Film, 0.0625W, 4700ohm, 50V, 5% +/-Tol, 100ppm/Cel, Surface Mount, 0402", Case/Package=0402, Manufacturer Part Number=Blank, Max Operating Temperature=155°C, Min Operating Temperature=-55°C, Package Height=0.35mm, Package Length=1mm, Package Shape=Rectangular, Package Width=0.5mm, Power=62.5mW, Rated Temperature=70°C, Resistor Type="FIXED RESISTOR", Temperature Coefficient (ppm/Cel)=200, Tolerance=5%, Working Voltage=50V, Additional Feature="LASER TRIMMABLE", AECQ=No, Construction=Chip, JESD-609 Code=e3, Mounting Technology="Surface Mount", Packaging="Tape and Reel", Pins=2, Reach SVHC Compliant=Yes, RoHS Compliant=Yes, Technology="METAL GLAZE/THICK FILM", Terminal Finish=Nickel, Termination=Wraparound
R8 R9 R10 R11 R12 R13: library part RES_0402, "RES 0402"
R14 R18 R19: library part CMP-009-00221-1, "Res Thick Film 0402 11K Ohm 1% 0.063W(1/16W) ±100ppm/C Pad SMD Automotive T/R", Case/Package=0402, Max Operating Temperature=155°C, Min Operating Temperature=-55°C, Power=62.5mW, Tolerance=1%, AECQ=Yes, Mounting Technology="Surface Mount", Pins=2, RoHS Compliant=Yes
R15 R20 R21: library part CMP-009-00227-1, "Res Thick Film 0402 75K Ohm 1% 0.063W(1/16W) ±100ppm/C Pad SMD T/R", Case/Package=0402, Max Operating Temperature=155°C, Min Operating Temperature=-55°C, Power=63mW, Tolerance=1%, AECQ=Yes, Mounting Technology=SMD, Pins=2
R16 R31: library part CMP-009-00198-3, "Fixed Resistor, Metal Glaze/thick Film, 0.0625W, 36000ohm, 50V, 1% +/-Tol, 100ppm/Cel, Surface Mount, 0402", Case/Package=0402, Max Operating Temperature=155°C, Min Operating Temperature=-55°C, Power=62.5mW, Tolerance=1%, AECQ=Yes, Mounting Technology=SMD, Pins=2
R17 R29 R30: library part CMP-009-00225-1, "Res Thick Film 0402 330 Ohm 1% 0.063W ±100ppm/°C Molded SMD Paper T/R", Case/Package=0402, Max Operating Temperature=155°C, Min Operating Temperature=-55°C, Power=62.5mW, Tolerance=1%, AECQ=Yes, Mounting Technology="Surface Mount", Pins=2, RoHS Compliant=Yes
R22 R23 R24: library part CMP-009-00185-8, "Fixed Resistor, Metal Glaze/thick Film, 0.0625W, 10000ohm, 50V, 5% +/-Tol, 100ppm/Cel, Surface Mount, 0402", Case/Package=0402, Manufacturer Part Number=Blank, Max Operating Temperature=155°C, Min Operating Temperature=-55°C, Package Height=0.35mm, Package Length=1mm, Package Shape=Rectangular, Package Width=0.5mm, Power=62.5mW, Rated Temperature=70°C, Resistor Type="FIXED RESISTOR", Temperature Coefficient (ppm/Cel)=200, Tolerance=5%, Working Voltage=50V, Additional Feature="LASER TRIMMABLE", AECQ=No, Construction=Rectangular, JESD-609 Code=e3, Mounting Technology="Surface Mount", Packaging="Tape and Reel", Pins=2, Reach SVHC Compliant=Yes, RoHS Compliant=Yes, Technology="METAL GLAZE/THICK FILM", Terminal Finish=Nickel, Termination=Wraparound
R25 R26 R27: library part CMP-009-00178-4, "Fixed Resistor, Metal Glaze/thick Film, 0.1W, 0ohm, Surface Mount, 0603", Case/Package=0603, Manufacturer Part Number=Blank, Max Operating Temperature=155°C, Min Operating Temperature=-55°C, Package Height=0.45mm, Package Length=1.6mm, Package Shape=Rectangular, Package Width=0.8mm, Power=100mW, Rated Temperature=70°C, Resistor Type="FIXED RESISTOR", Tolerance=0%, AECQ=No, Construction=Chip, JESD-609 Code=e3, Mounting Technology="Surface Mount", Packaging="Tape and Reel", Pins=2, Reach SVHC Compliant=Yes, RoHS Compliant=Yes, Technology="METAL GLAZE/THICK FILM", Terminal Finish=Nickel, Termination=Wraparound
U1: library part CMP-020-00029-2, "RISC Microcontroller, 32-Bit, FLASH, CORTEX-M4F CPU, 180MHz, CMOS, PBGA216", Case/Package="20-UFQFPN (3x3)", Clock Frequency=48MHz, Max Operating Temperature=85°C, Max Supply Current=4.1mA, Max Supply Voltage=3.6V, Min Operating Temperature=-40°C, Min Supply Voltage=3V, ADC Channels (Resolution)="13-Ch 12-Bit", EEPROM Memory Size=0B, Height - Seated (Max)=600µm, Interface="I2C, I2S, SPI", Length=3mm, Memory Format=FLASH, Number of I/Os=2, Operating Supply Voltage=3V, Peripherals="POR, PWM", RAM Size=6kB, Terminal Pitch=500µm, Width=3mm
U2: library part CMP-031-00015-4, "I²C controlled, 1-4-cell, 5-A buck-boost solar battery charger with dual-input selector and MPPT 29-VQFN-HR -40 to 85", Case/Package="29-VQFN-HR (4x4)", Max Operating Temperature=125°C, Min Operating Temperature=-40°C, AECQ=No, MPN=BQ25798RQMR, Pins=29
U3: library part CMP-010-00041-2, "Super Speed USB Controller USB 1.2/USB 2.0 5V/9V/12V/15V/18V T/R 24-Pin QFN EP", Case/Package="24-QFN (4x4)", Max Operating Temperature=105°C, Max Supply Voltage=22V, Min Operating Temperature=-40°C, Min Supply Voltage=4.1V, Operating Supply Voltage=5V, Width=4mm
U4: library part CMP-010-00042-1, "S-PDSO-N8 Buttons 1997 Tape & Reel (TR) capacitive touch sensor 2mm 378.5muA 14b 1.8V~5.5V", Case/Package=8-UFDFN, Max Operating Temperature=85°C, Max Supply Voltage=5.5V, Min Operating Temperature=-40°C, Min Supply Voltage=1.8V, Pins=8
U5: library part CMP-019-00070-2, "INTERSIL DG412DJZ Analogue Switch, SPST, 4 Channels, 35 ohm, 5V to 34V, DIP, 16 Pins", Case/Package="6-WSON (2x2)", Max Operating Temperature=125°C, Max Supply Voltage=28V, Min Operating Temperature=-40°C, Min Supply Voltage=3.66V, Nominal Supply Current=2µA, Output Current=150mA, Output Voltage=3.3V, Mounting Technology=SMT, Pins=6, RoHS Compliant=Yes

## Free pads (board coordinates)
  round 0 hole 2.1 unplated: 2(6.114,19.661) 2(23.614,2.161)
  rrect50% 3.5x3.5 smd: 3(18.7,2.3)

## Via types
v1: diameter 0.5, hole 0.3, Top Layer to Bottom Layer, tented both sides, 94 vias

## Nets (pads, with @x,y where several pads share a name; then routed paths per layer and width w, separated by ;. In a path a pad name is that pad's centre, name@x,y a point inside that pad or via, vN(x,y) a via of type N, cw(c..) or ccw(c..) an arc to the next point about the centre after c; other vN are vias at no path point)
3V3: C7.2 C24.2 D1.4 J2.2 R3.2 R6.1 R7.1 U1.2 U4.7 U5.1 | length 55.8
  Top Layer w0.254: v1(3.4,7.5) J2.2 ; v1(21.1,5.1) 22.8,5.1 ; v1(22.4,4.5) 22.8,4.9 22.8,5.1 ; D1.4 23.786,9.9 25.6,9.9 26.9,8.6 26.9,6.2 25.8,5.1 22.8,5.1
  Layer 1 w0.254: v1(6.7,14.9) 7.2,15.4 8.55,15.4 9.85,14.1 15.1,14.1 15.7,13.5 15.7,10.5 v1(21.1,5.1)
  Layer 2 w0.254: v1(3.4,7.5) 3.4,8.2 5.8,10.6 5.8,12.5 6.705,13.405 6.705,14.895 v1(6.7,14.9)
  Bottom Layer w0.127: R3.2@6.5,13.5 6.7,13.7 v1(6.7,14.9) ; C7.2 C7.2@22.916,5.211
  Bottom Layer w0.254: U1.2 4.215,14.615 4.715,14.615 5.327,15.227 5.427,15.227 C24.2 6.2,15.4 v1(6.7,14.9) ; U4.7 20.352,5.148 20.986,5.148 21.033,5.1 v1(21.1,5.1) 21.167,5.1 21.267,5.2 22.086,5.2 ; U5.1 21.353,7.15 21.376,7.127 21.376,6.824 22.086,6.114 22.086,5.2 ; v1(22.4,4.5) 22.732,4.832 22.732,5.027 C7.2 22.086,5.2 ; R7.1 R6.1@22.9,10.608 ; R6.1 R6.1@22.9,10.608 ; v1(23.8,10) 23.29,10.51 22.998,10.51 R6.1@22.9,10.608
5V_REGN: R9.1 R11.1 R16.2 U2.5 | length 12.6
  Layer 1 w0.127: v1(14.6,12.9) 14.1,12.4 14.1,11.4 17.4,8.1 v1(17.4,6.9)
  Bottom Layer w0.127: U2.5 14.128,12.228 14.128,12.558 14.399,12.829 14.529,12.829 v1(14.6,12.9) ; R9.1 17.1,6.6 v1(17.4,6.9) 18.063,7.564 18.138,7.564 18.3,7.725 R11.1
  Bottom Layer w0.254: R11.1 18.8,7.8 19.302,8.302 19.602,8.302 R16.2
ATTACH: U3.11 | length 1.8
  Top Layer w0.127: v1(10.965,21.526) 11.014,21.531 11.202,21.765 11.394,21.786 11.984,21.309 11.996,21.202 11.774,20.927 U3.11
BLNC_1: Q6.1 U1.8 | length 14.7
  Top Layer w0.127: v1(10.5,8.647) 10.503,8.65 Q6.1
  Layer 1 w0.127: v1(5,7.4) 9.253,7.4 v1(10.5,8.647)
  Bottom Layer w0.127: U1.8 2.9,11.1 3.4,10.6 3.4,8.815 4.744,7.471 4.929,7.471 v1(5,7.4)
BLNC_2: Q5.1 U1.20 | length 12.2
  Top Layer w0.127: v1(6.823,8.694) 6.867,8.65 Q5.1
  Layer 1 w0.127: v1(4.2,16.1) 4.2,13.7 5.3,12.6 5.3,9.6 6.206,8.694 v1(6.823,8.694)
  Bottom Layer w0.127: U1.20 3.9,15.8 v1(4.2,16.1)
BLNC_3: Q4.1 U1.1 | length 8.8
  Top Layer w0.127: Q4.1 6.115,8.65 6.286,8.822 6.286,8.887 6.5,9.1 v1(6.5,9.5)
  Layer 1 w0.127: v1(4.8,15.7) 4.8,13.8 5.7,12.9 5.7,10.3 v1(6.5,9.5)
  Bottom Layer w0.127: U1.1 4.8,15.6 v1(4.8,15.7)
CC1: J1.B5 U3.1 U3.2 | length 7.4
  Top Layer w0.127: U3.1 12.345,16.34 v1(12.726,16.381) 12.701,16.401 12.666,16.723 U3.2
  Layer 1 w0.127: v1(12.726,16.381) 13.504,15.753 15.191,15.934 16.604,14.795 v1(16.7,13.9)
CC2: J1.A5 U3.4 U3.5 | length 8.8
  Top Layer w0.127: U3.4 13.286,17.508 13.527,17.534 13.715,17.767 ; U3.5 13.711,17.808 13.715,17.767 ; v1(14.325,18.046) 13.903,18.001 13.715,17.767
  Layer 1 w0.127: v1(14.325,18.046) 15.181,17.355 15.285,16.393 17.347,14.73 v1(17.5,13.3)
CHG_BATP: C17.1 R13.2 U2.18 | length 4.1
  Top Layer w0.127: v1(14.9,9.1) 14.918,9.082 15.243,9.082 C17.1 15.611,7.689 16.3,7 R13.2
  Bottom Layer w0.127: U2.18 v1(14.9,9.1)
CHG_BTST1: C11.1 U2.4 | length 9.5
  Layer 1 w0.127: v1(6.5,12.3) 7.293,13.093 13.944,13.093 v1(13.953,13.101)
  Bottom Layer w0.127: v1(6.5,12.3) C11.1 ; U2.4 13.7,12.841 13.953,13.094 v1(13.953,13.101)
CHG_BTST2: C12.1 U2.19 | length 11.4
  Layer 1 w0.127: v1(6.5,11.3) 9.6,11.3 13.513,7.387 v1(14.5,7.387)
  Bottom Layer w0.127: v1(6.5,11.3) C12.1 ; v1(14.5,7.387) U2.19
CHG_PMID: C13.2 C14.2 C15.2 C16.1 U2.29 | length 10
  Top Layer w0.4: C15.2 C14.2@10.575,10.5 ; v1(11.4,12) v1(11.4,11.255) 11.396,11.255 11.116,10.975 11.05,10.975 C14.2@10.575,10.5 ; C13.2 10.85,10.025 C14.2 ; C14.2 C14.2@10.575,10.5 ; C14.2 C14.2@10.575,10.5
  Bottom Layer w0.254: v1(11.4,12) v1(11.4,11.255) 11.467,11.255 11.522,11.2 U2.29
  Bottom Layer w0.4: v1(11.4,12) C16.1
CHG_PROG: R8.2 U2.20 | length 1
  Bottom Layer w0.127: R8.2 13.775,7.6 13.936,7.761 13.936,7.836 14.1,8 U2.20
CHG_SW1: C11.2 L1.2 U2.28 | length 5.3
  Bottom Layer w0.127: C11.2 9.975,12.3 L1.2
  Bottom Layer w0.254: L1.2 10.048,12.123 10.048,11.549 10.847,10.75 U2.28
CHG_SW2: C12.2 L1.1 U2.26 | length 5.1
  Bottom Layer w0.127: C12.2 8.391,11.109 8.616,11.109 9.384,10.341 9.384,10.161 9.92,9.625 L1.1
  Bottom Layer w0.254: L1.1 10.325,9.85 U2.26
CHG_SYS: C21.1 C22.2 C23.2 U2.25 | length 6.5
  Bottom Layer w0.254: C23.2 8.282,9.193 8.282,8.493 8.727,8.048 9.275,7.5 C22.2 ; C22.2@9.723,7.9 C21.1 10.873,8.073 11.004,8.073 11.5,8.569 11.5,9.1 11.8,9.4 U2.25
ELECTRODE: pad.3 R5.1 | length 6
  Top Layer w0.127: pad.3 19.5,3.1 20.9,3.1 v1(21.7,3.9)
  Bottom Layer w0.127: R5.1 20.6,2.8 v1(21.7,3.9)
EN_VSNS: Q10.1 U1.14 | length 11.1
  Layer 2 w0.127: v1(0.659,14.9) 2.058,13.5 4.5,13.5 6.4,15.4 7.4,15.4 8,14.8 v1(8.1,14.8)
  Bottom Layer w0.127: v1(0.659,14.9) 0.7,14.9 1,14.6 U1.14 ; Q10.1 7.522,14.422 7.721,14.422 v1(8.1,14.8)
GATE_VSNS: Q7.1 Q8.1 Q9.1 Q10.3 R28.1 | length 25.2
  Layer 2 w0.127: v1(2.6,8.8) 2.6,7.3 3,6.9 3.9,6.9 4.3,7.3 4.3,8.4 5.9,10 7.1,10 7.9,10.8 7.9,13.4 v1(8.5,14)
  Bottom Layer w0.127: Q8.1 1.25,8.55 1.2,8.5 ; Q9.1 2.35,3.15 2.1,3.4 2.1,4 2.175,4.075 2.175,5.025 1.6,5.6 1.6,6.3 1.262,6.638 1.262,6.738 1.1,6.9 R28.1 1,8.3 1.2,8.5 ; Q7.1 2.55,8.75 2.5,8.8 2.2,8.8 1.9,8.5 1.25,8.5 1.2,8.5 ; v1(8.5,14) 9.05,14.55 9.05,14.728 9.221,14.9 Q10.3
GND: C1.1 C2.1 C3.1 C4.1 C6.1 C7.1 C13.1 C14.1 C15.1 C16.2 C17.2 C19.2 C20.1 C21.2 C22.1 C23.1 C24.1 C25.1 C26.1 C27.1 J1.A12 J1.B12 J1.SH1 J1.SH2 J1.SH3 J1.SH4 J2.3 J3.4 Q3.3 Q4.2 Q5.2 Q6.2 Q10.2 R2.1 R4.1 R8.1 R10.2 R12.2 R15.1 R20.1 R21.1 R31.1 U1.3 U2.10 U2.11 U2.13 U2.27 U3.3 U3.10 U3.12 U3.13 U3.22 U3.25 U4.4 U4.6 U4.9 U5.3 U5.7 | length 36.2
  Top Layer w0.127: C27.1 1.242,3.342 1.242,3.317 1.084,3.159 1.084,2.496 1.279,2.3 ; C26.1 2.601,0.9 2.501,1 v1(2.4,1) 1.861,1.539 1.861,1.638 1.7,1.8 R21.1 1.5,1.8 1.338,1.961 1.338,2.241 1.279,2.3 ; v1(3.5,2.8) 3.264,2.564 3,2.3 1.279,2.3 ; v1(5.2,2.8) R15.1 ; R2.1@8.165,21.635 R2.1 ; Q5.2 10.35,7.35 10.501,7.199 10.629,7.199 v1(10.7,7.128)
  Top Layer w0.254: U3.22 10.839,18.077 10.966,18.234 U3.25@11.212,18.539 ; U3.13 U3.25@10.986,20.648 ; U3.12 U3.25@10.986,20.648 ; U3.10 11.503,19.697 U3.25@11.136,19.242 ; J1.SH2 13.531,16.668 U3.3 11.503,18.303 U3.25@11.212,18.539 ; U3.25@10.986,20.648 11.081,19.755 11.084,19.73 U3.25@11.136,19.242 ; U3.25@11.136,19.242 U3.25 U3.25@11.212,18.539
  Top Layer w0.4: v1(10.846,19.73) 11.084,19.73 11.47,19.73 11.503,19.697 v1(12.2,19) 11.503,18.303 11.1,17.9 v1(11.058,17.9) 11.058,18.142 10.966,18.234 v1(10.3,18.9) 11.164,18.9 U3.25 ; J3.4 14.665,3.015 14.665,4.515 Q3.3
  Bottom Layer w0.127: v1(3,14.1) U1.3 5.3,14.1 C24.1 v1(6.2,14.4) ; R8.1 13.775,6.6 13.936,6.438 13.937,6.364 14.1,6.2 14.8,6.2 ; C7.1@23.705,5.4 C7.1 C6.1
  Bottom Layer w0.254: U4.4 18.253,6.147 18.835,6.147 18.909,6.073 18.927,6.073 19.3,5.7 U4.9@19.3,5.682 ; U4.9 U4.9@19.3,5.682 ; U4.6 19.332,5.65 U4.9@19.3,5.682 ; U5.3 21.339,8.437 21.927,8.437 22.3,8.063 U5.7
  other v1: 22.8,6 18.4,7 19.8,9.4 15.088,9.788 1.941,10.134 6.823,10.501 8.847,11.8 5.3,16.3 7.7,22.1
LED_B: D1.1 R30.2 | length 0.8
  Top Layer w0.127: R30.2 22.555,9.371 22.69,9.305 cw(c22.634,9.191) 22.709,9.293 22.958,9.108 D1.1
LED_G: D1.2 R29.2 | length 0.9
  Top Layer w0.127: D1.2 23.624,8.575 24.012,8.255 R29.2
LED_R: D1.3 R17.2 | length 0.9
  Top Layer w0.127: D1.3 24.099,9.165 24.352,9.194 cw(c24.367,9.068) 24.399,9.191 cw(c24.367,9.068) 24.439,9.173 24.678,9.006 R17.2
LEDR: R17.1 U1.15 | length 31.6
  Top Layer w0.127: R17.1 25.611,8.308 25.887,8.308 26.194,8 v1(26.2,8)
  Layer 1 w0.127: v1(2.2,17.4) 8.5,17.4 11.2,14.7 15.1,14.7 19.4,10.4 22.6,10.4 23.7,9.3 24.9,9.3 v1(26.2,8)
  Bottom Layer w0.127: U1.15 1,15.6 1,16.1 1.6,16.7 1.6,16.8 v1(2.2,17.4)
NetC18_1: C18.1 U2.24 | length 2.1
  Bottom Layer w0.127: C18.1 11.716,7.516 11.716,7.916 12,8.2 12.5,8.2 U2.24
NetQ1_1: Q1.1 Q4.3 R22.2 | length 8.2
  Top Layer w0.127: Q4.3 8.015,8 8.186,7.829 8.186,7.764 8.55,7.4 Q1.1 8.55,6.385 8.379,6.213 8.313,6.213 7.3,5.2 7.3,4.333 8.1,3.533 R22.2
NetQ1_2: Q1.2 R25.2 | length 1.1
  Top Layer w0.4: R25.2 6.325,6.45 Q1.2
NetQ2_1: Q2.1 Q5.3 R23.2 | length 7.8
  Top Layer w0.127: R23.2 10.7,5.2 11.714,6.214 11.779,6.214 11.95,6.385 Q2.1 11.95,7.4 11.586,7.763 11.586,7.828 11.415,8 Q5.3
NetQ2_2: Q2.2 R26.2 | length 1.1
  Top Layer w0.4: R26.2 9.725,6.45 Q2.2
NetQ3_1: Q3.1 Q6.3 R24.2 | length 8.3
  Top Layer w0.127: R24.2 13.1,3.6 13.8,4.3 13.8,4.9 15.113,6.213 15.178,6.214 15.35,6.385 Q3.1 15.35,7.4 14.986,7.763 14.986,7.828 14.815,8 Q6.3
NetQ3_2: Q3.2 R27.2 | length 1.1
  Top Layer w0.4: R27.2 13.125,6.45 Q3.2
NetQ7_3: Q7.3 R14.2 | length 2.7
  Bottom Layer w0.127: Q7.3 4.25,4.85 4.483,4.617 4.483,4.596 4.87,4.209 4.891,4.209 v1(5.4,3.7)
NetQ8_3: Q8.3 R18.2 | length 8.2
  Bottom Layer w0.127: Q8.3 1.9,5.8 2.5,5.2 2.5,4.7 2.9,4.3 3.8,4.3 4.4,3.7 4.4,2.3 4.9,1.8 v1(5.4,1.8)
NetQ9_3: Q9.3 R19.2 | length 3.4
  Bottom Layer w0.127: Q9.3 1.7,2.1 2,1.8 v1(2.5,1.8)
NetR9_2: R9.2 R10.1 U2.17 | length 1.9
  Bottom Layer w0.127: U2.17 15.3,7.762 15.462,7.6 R10.1 R9.2
NetR11_2: R11.2 R12.1 U2.16 | length 2.6
  Bottom Layer w0.127: U2.16 17.139,8.9 17.3,8.738 R12.1 R11.2
RST_L: J2.1 R3.1 U1.4 | length 14.2
  Top Layer w0.127: J2.1 3.8,6.462 v1(3.8,5.841)
  Layer 1 w0.127: v1(3.8,5.841) 3.8,6.5 4.1,6.8 4.1,8 4.7,8.6 5.6,8.6 6,8.2 7.1,8.2 7.4,8.5 7.4,9.3 6,10.7 6,13.339 5.8,13.539 v1(5.8,13.6)
  Bottom Layer w0.127: U1.4 v1(5.8,13.6)
RX: J2.7 U1.6 | length 1.4
  Top Layer w0.254: J2.7 v1(4.5,12.5)
  Bottom Layer w0.127: U1.6 4.139,12.7 4.268,12.571 4.429,12.571 v1(4.5,12.5)
SCL: R6.2 U1.18 U2.14 U3.7 | length 31.8
  Top Layer w0.127: U3.7 13.816,19.2 v1(13.846,19.204)
  Layer 2 w0.127: v1(2.9,16.4) 3.7,17.2 11.842,17.2 13.917,19.275 14.096,19.275 14.106,19.286 14.543,19.286 14.916,18.913 14.916,17.484 15.1,17.3 15.1,14.6 18.42,11.28 v1(18.42,9.943)
  Bottom Layer w0.127: U1.18 v1(2.9,16.4) ; U2.14 18.1,9.7 18.343,9.943 v1(18.42,9.943) 18.777,10.3 21.5,10.3 21.638,10.439 21.738,10.439 21.9,10.6 R6.2
SDA: R7.2 U1.19 U2.15 U3.8 | length 32.9
  Top Layer w0.127: U3.8 13.037,19.908 13.218,20.132 13.418,20.153 14.32,19.426 v1(14.39,18.764)
  Layer 2 w0.127: v1(3.5,16.1) 4.2,16.8 11.9,16.8 ; v1(14.39,18.764) 14.388,18.762 13.862,18.762 11.9,16.8 ; v1(19,9.5) 18.1,9.5 17.8,9.8 17.8,11.4 13.5,15.7 12.3,15.7 11.9,16.1 11.9,16.8
  Bottom Layer w0.127: U1.19 3.45,15.45 3.45,16.05 v1(3.5,16.1) ; U2.15 18.739,9.3 18.939,9.5 v1(19,9.5) 19.061,9.5 19.461,9.9 21.739,9.9 21.9,9.738 R7.2
SNS: C5.2 U4.8 | length 1.1
  Bottom Layer w0.127: C5.2 20.35,4.35 U4.8
SNSK: C5.1 R5.2 U4.1 | length 2.1
  Bottom Layer w0.127: U4.1 18.25,4.35 C5.1 R5.2
SWCLK: J2.5 R4.2 R30.1 U1.17 | length 36.5
  Top Layer w0.127: v1(2.1,11.9) 2.6,11.4 2.6,10.9 2.786,10.714 3.549,10.714 J2.5 ; v1(21.1,9.459) 21.171,9.387 21.171,9.226 R30.1
  Layer 1 w0.127: v1(2.1,11.9) 2.1,12.6 1.1,13.6 1.1,16.2 1.5,16.6 1.9,16.6 v1(2.2,16.3)
  Layer 2 w0.127: v1(2.2,16.3) 3.4,15.1 4.9,15.1 6.2,16.4 9.5,16.4 11.3,14.6 14.1,14.6 17.4,11.3 17.4,9.6 18.1,8.9 20.542,8.9 v1(21.1,9.459)
  Bottom Layer w0.127: U1.17 2.4,16.039 2.2,16.239 v1(2.2,16.3) 2.225,16.325 2.225,16.74 2.785,17.3 R4.2
SWDIO: J2.4 R29.1 U1.16 | length 38.3
  Top Layer w0.127: v1(2.1,11.2) 2.1,10.6 2.963,9.737 3.526,9.737 J2.4
  Top Layer w0.254: R29.1 23.586,7.224 23.9,6.91 v1(23.9,6.358)
  Layer 1 w0.127: v1(1.6,16) 1.6,13.7 2.6,12.7 2.6,11.7 v1(2.1,11.2)
  Layer 2 w0.127: v1(1.6,16) 2.9,14.7 5,14.7 6.3,16 9.3,16 11.1,14.2 14,14.2 17,11.2 17,9.4 17.9,8.5 20.968,8.5 22.227,7.241 23.017,7.241 v1(23.9,6.358)
  Bottom Layer w0.127: v1(1.6,16) 1.9,15.7 U1.16
TX: J2.6 U1.5 | length 3
  Top Layer w0.254: J2.6 v1(3.781,11.481)
  Bottom Layer w0.127: v1(3.781,11.481) 4.181,11.481 5,12.3 5,12.9 4.8,13.1 U1.5
VBUS: C3.2 C19.1 C20.2 J1.A9 J1.B9 R1.2 U2.2 U2.3 U2.8 U2.9 U3.24 | length 39.5
  Top Layer w0.127: v1(8.4,22.8) 8.787,22.413 R1.2
  Top Layer w0.254: U3.24 10.737,16.357 10.795,15.814 10.604,15.577 C3.2 11.386,15.347 11.433,15.3 v1(11.5,15.3)
  Top Layer w0.4: v1(13.5,11.4) 13.527,11.403 13.614,11.333 13.881,11.361 14.036,11.236 14.704,11.307 14.827,11.459 C20.2 14.893,11.47 15.214,11.504 15.811,11.023 16.804,11.129 16.824,11.153 16.903,11.162 17.663,12.104 J1.B9 18.685,13.198 18.649,13.531 16.963,14.891 16.652,15.142 16.318,15.106 15.906,14.595 J1.A9
  Layer 1 w0.127: v1(8.4,22.8) 11.5,19.7 v1(11.5,15.3)
  Layer 1 w0.254: v1(11.5,15.3) 15.2,15.3 v1(15.9,14.6)
  Bottom Layer w0.2: C19.1 12.5,13 12.826,13 ; U2.9 15.7,12.786 15.3,13.186 ; 12.826,13 13.151,13 ; 12.826,13 12.9,12.926 U2.2 12.9,11.849 13.049,11.7 13.262,11.7 13.3,11.662 ; 13.151,13 13.3,12.851 U2.3 13.3,11.662 ; 13.151,13 13.151,13.151 13.7,13.7 14.786,13.7 15.3,13.186 ; 13.3,11.662 13.5,11.462 v1(13.5,11.4) v1(14.9,11.4) 15.3,11.8 U2.8 15.3,13.186
VBUS_VS_DISCH: C4.2 R1.1 R2.2 U3.18 | length 5.4
  Top Layer w0.254: C4.2 8.123,18.134 U3.18 8.563,19.39 8.465,20.31 R2.2 R1.1
VCELL1: J3.3 Q2.3 Q9.2 R24.1 R27.1 | length 21
  Top Layer w0.127: J3.3 12.1,2.65 R24.1
  Top Layer w0.4: Q2.3 11.3,4.485 11.335,4.45 11.4,4.45 11.692,4.158 11.692,3.058 J3.3 12.208,3.058 12.208,3.883 12.775,4.45 12.775,4.525 12.925,4.675 R27.1
  Layer 2 w0.127: v1(0.8,3.5) 1.7,2.6 2.9,2.6 3,2.5 3,1.5 3.5,1 10.5,1 11.95,2.45 J3.3
  Bottom Layer w0.127: v1(0.8,3.5) 0.8,2.961 0.874,2.886 0.878,2.886 1.05,2.715 Q9.2
VCELL2: J3.2 Q1.3 Q8.2 R23.1 R26.1 | length 17.7
  Top Layer w0.127: J3.2 9.7,2.55 R23.1
  Top Layer w0.4: Q1.3 9.475,4.55 R26.1@9.525,4.6 ; J3.2 9.525,2.875 R26.1@9.525,4.6 ; R26.1 R26.1@9.525,4.6
  Layer 2 w0.127: v1(2,9.5) 2,7.1 2.5,6.6 4.3,6.6 4.7,6.2 6.05,6.2 J3.2
  Bottom Layer w0.127: v1(2,9.5) 2.4,9.5 Q8.2
VCELL3: C6.2 C18.2 J3.1 Q7.2 R13.1 R22.1 R25.1 R28.2 U2.22 U2.23 U5.4 U5.6 | length 50.3
  Top Layer w0.127: J3.1@6.886,2.8 J3.1 7.1,2.65 R22.1 ; v1(15.262,5.562) 15.361,5.562 15.523,5.4 R13.1
  Top Layer w0.4: R25.1 6.275,4.675 6.425,4.525 6.425,4.065 6.95,3.54 J3.1
  Layer 1 w0.127: v1(12.9,5.5) 15.2,5.5 v1(15.262,5.562)
  Layer 1 w0.254: J3.1 8.95,0.8 20.1,0.8 25.453,6.153 25.653,6.153 v1(25.7,6.2)
  Layer 2 w0.127: v1(0.7,4.222) 1.878,5.4 v1(5,5.4) 6.95,3.45 J3.1
  Bottom Layer w0.127: v1(0.7,4.222) 0.771,4.293 0.771,4.471 1,4.7 R28.2 ; Q7.2 3.85,6.685 4.929,5.606 4.929,5.471 v1(5,5.4)
  Bottom Layer w0.2: C18.2 C18.2@12.9,7.7 ; U2.22 U2.22@13.303,8.403 ; v1(13.89,9.14) v1@13.66,9.14 ; C18.2@12.9,7.7 13.303,8.103 U2.22@13.303,8.403 ; C18.2@12.9,7.7 U2.23 12.9,8.8 13.24,9.14 v1@13.66,9.14 ; U2.22@13.303,8.403 13.303,8.783 v1@13.66,9.14
  Bottom Layer w0.254: U5.6 23.955,7.15 24,7.105 ; U5.4 23.75,8.45 24,8.2 24,7.105 ; v1(25.7,6.2) C6.2 24,7.105
VREG_1V2: C2.2 U3.21 | length 1.2
  Top Layer w0.254: C2.2 9.065,16.673 U3.21
VREG_2V7: C1.2 U3.23 | length 1.2
  Top Layer w0.254: C1.2 9.843,16.045 U3.23
VSNS_CELL1: C27.2 R19.1 R21.2 U1.11 | length 12.4
  Top Layer w0.127: R21.2 R19.1 2.5,3.6 v1(2.6,3.7)
  Layer 1 w0.127: v1(0.6,10.4) 0.6,6.7 2.6,4.7 v1(2.6,3.7)
  Bottom Layer w0.127: v1(0.6,10.4) 0.6,10.5 1.258,11.158 1.258,12.059 1.5,12.3 U1.11
VSNS_CELL2: C26.2 R18.1 R20.2 U1.12 | length 15.8
  Top Layer w0.127: v1(3.5,1.9) 3.6,1.8 R18.1 R20.2@4.4,0.9
  Layer 1 w0.127: v1(1,12.6) 1.5,12.1 1.5,6.8 4.3,4 4.3,2.7 v1(3.5,1.9)
  Bottom Layer w0.127: v1(1,12.6) 1,13.526 1.074,13.6 U1.12
VSNS_CELL3: C25.2 R14.1 R15.2 U1.13 | length 14.3
  Top Layer w0.127: v1(3.5,3.8) 3.6,3.7 R14.1 R15.2
  Layer 1 w0.127: v1(0.6,11.7) 1.1,11.2 1.1,6.7 3.5,4.3 v1(3.5,3.8)
  Bottom Layer w0.127: v1(0.6,11.7) 0.529,11.771 0.529,11.932 0.5,11.961 0.5,13.8 0.8,14.1 U1.13
WKUP2: R16.1 R31.2 U1.9 | length 32.6
  Layer 2 w0.127: v1(5,6.7) 6,6.7 7.4,8.1 19.8,8.1 v1(20.5,7.4) ; v1@20.571,7.471 v1(20.5,7.4) ; v1(25.3,7.4) 24.7,6.8 24.7,6.2 24.3,5.8 23.7,5.8 22.7,6.8 21.1,6.8 v1(20.5,7.4)
  Bottom Layer w0.127: U1.9 2.458,12.742 2.458,12.342 2.6,12.2 2.6,10.9 3.1,10.4 3.1,8.6 v1(5,6.7)
  Bottom Layer w0.254: R16.1 R16.1@19.8,7.4 ; R16.1@19.898,7.302 R16.1@19.8,7.4 ; v1(20.5,7.4) R16.1@19.8,7.4 ; v1@25.253,7.447 v1(25.3,7.4) 25.7,7 R31.2
WKUP4: U1.7 U4.5 | length 28.1
  Layer 1 w0.127: v1(5,8.1) 5.3,7.8 8.7,7.8 10.1,9.2 11,9.2 13.8,6.4 15.6,6.4 16.2,5.8 17.7,4.3 21.3,4.3 21.9,4.9 21.9,5.5 21.3,6.1 v1(21.2,6.1)
  Bottom Layer w0.127: U1.7 3.4,12.3 3.2,12.1 3.2,11.3 3.7,10.8 3.7,9 4.6,8.1 v1(5,8.1) ; U4.5 21.15,6.15 v1(21.2,6.1)
pads on no net: J1.H1 J1.H2 J2.M U1.10 U2.1 U2.6 U2.7 U2.12 U2.21 U3.6 U3.9 U3.14 U3.15 U3.16 U3.17 U3.19 U3.20 U4.2 U4.3 U5.2 U5.5

## Polygon pours and split planes (outlines as drawn)
GND on Bottom Layer "NONET_L-01_P-001" (solid, pour order 7): 0,0 28.7,0 28.7,23.6 0,23.6
VCELL3 on Bottom Layer "PolygonDirect" (solid, pour order 4): 14.3,9.4 14.3,6.2 9.4,1.3 5.9,1.3 5.9,3.9 8.2,6.2 10.8,6.2 12.2,7.6 12.2,9.4
GND on Top Layer "NONET_L-01_P-001" (solid, pour order 0): 0,0 28.7,0 28.7,23.6 0,23.6

## Other copper
Bottom Layer:
  region net TX: 4.05,13.1 4.2,12.95 4.55,12.95 4.55,13.25 4.05,13.25
  region net BLNC_3: 4.05,15.1 4.05,14.95 4.55,14.95 4.55,15.25 4.2,15.25
  region: 1.75,12.8 1.75,12.45 2.05,12.45 2.05,12.95 1.9,12.95
  region net RX: 3.75,12.45 4.05,12.45 4.05,12.8 3.9,12.95 3.75,12.95
  region net LEDR: 1.25,14.95 1.75,14.95 1.75,15.1 1.6,15.25 1.25,15.25
  region net VSNS_CELL1: 1.25,12.95 1.6,12.95 1.75,13.1 1.75,13.25 1.25,13.25
  region net SWDIO: 1.75,15.4 1.9,15.25 2.05,15.25 2.05,15.75 1.75,15.75
  region net BLNC_2: 3.75,15.25 3.9,15.25 4.05,15.4 4.05,15.75 3.75,15.75
Multi-Layer:
  pour cut-out: 22.295,0.527 ccw(c23.614,2.161) 25.248,0.843 ccw(c23.614,2.161) 24.932,3.796 ccw(c23.614,2.161) 21.979,3.48 ccw(c23.614,2.161)
  pour cut-out: 4.795,18.026 ccw(c6.114,19.661) 7.748,18.343 ccw(c6.114,19.661) 7.432,21.296 ccw(c6.114,19.661) 4.479,20.979 ccw(c6.114,19.661)

## Silkscreen, mask and mechanical layers (free items; w line width, h text height)
Board Outline:
  lines w0.1: 0,4 ccw(c4,4) 4,0 22.3,0 23.25,0 ccw(c23.25,3.066) 25.418,0.898 25.534,1.014 27.857,3.894 ccw(c24.743,6.406) 27.254,9.519 10.908,22.702 ccw(c8.397,19.588) 5.283,22.1 1.077,16.884 ccw(c3.678,14.284) 0,14.284 0,8.9 0,4
Notes:
  circle w0.1: c23.614,2.161 r2.11
  circle w0.1: c6.114,19.661 r2.11
  lines w0.1: -11.386,30.533 29.994,-2.839 ; -11.386,34.387 34.773,-2.839 ; -11.386,37.161 -11.386,19.661 6.114,19.661 6.114,2.161 23.614,2.161 ; 8.214,19.654 ccw(c6.114,19.661) 8.214,19.654
  text "141.115" at 14,22.3 h1